# EAGLE board shieldV4 (EAGLE 8.7.1)
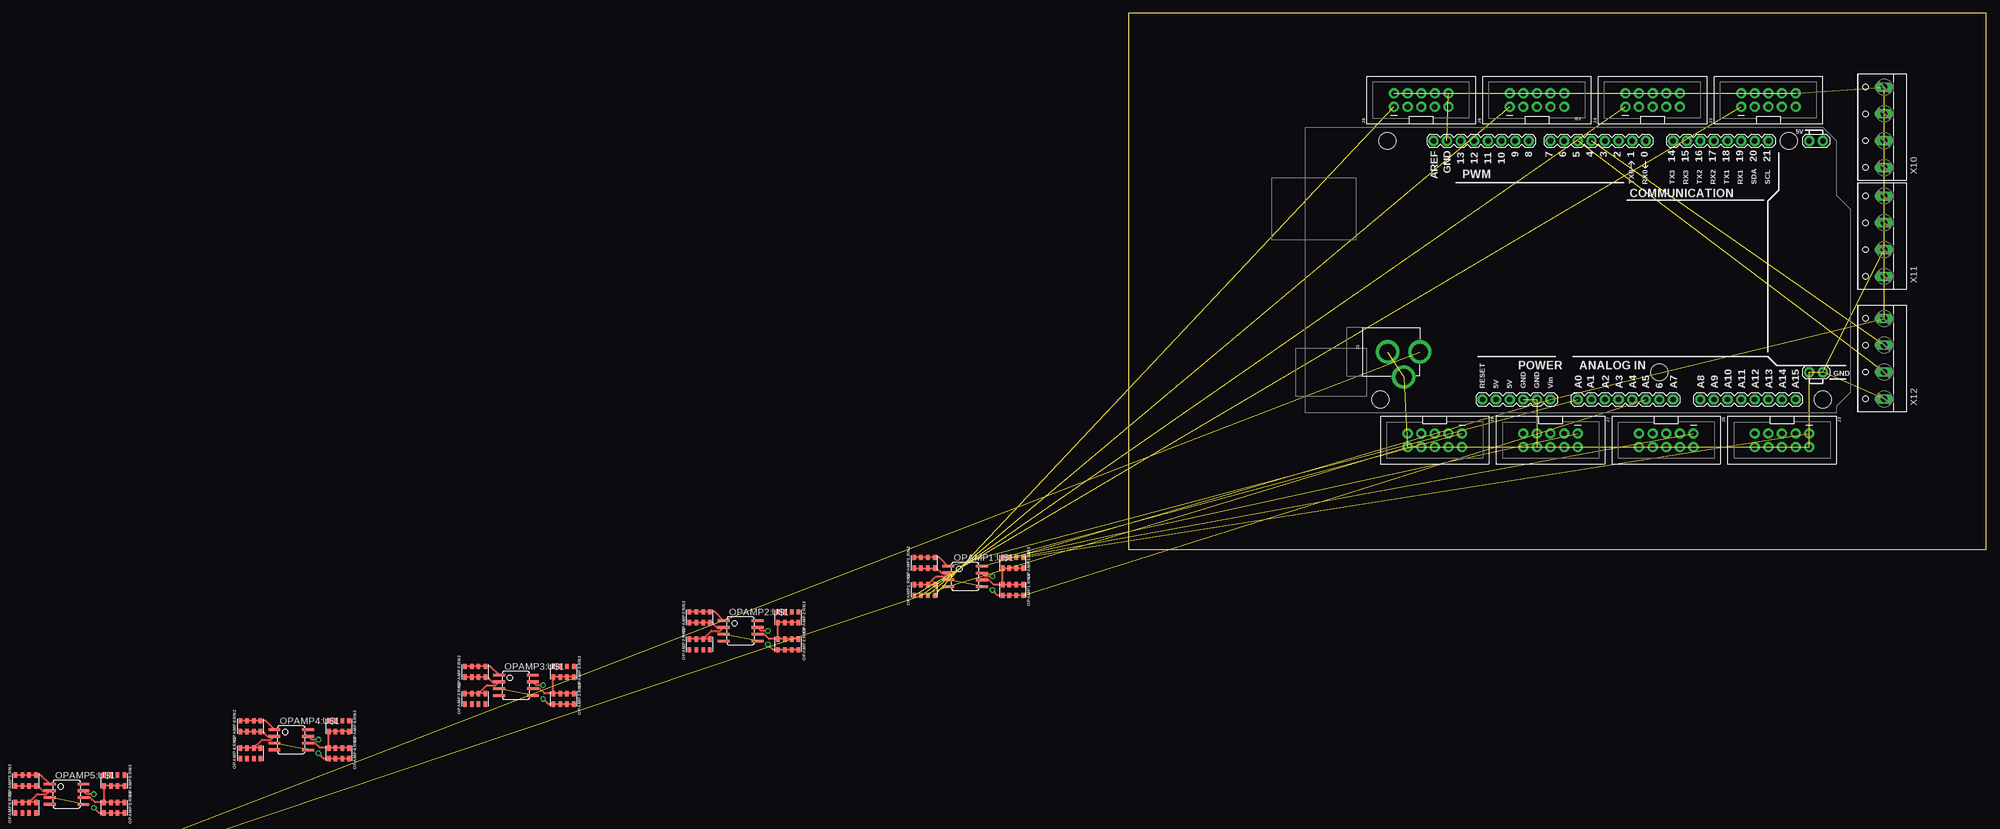
[diagram p0: board, top side]
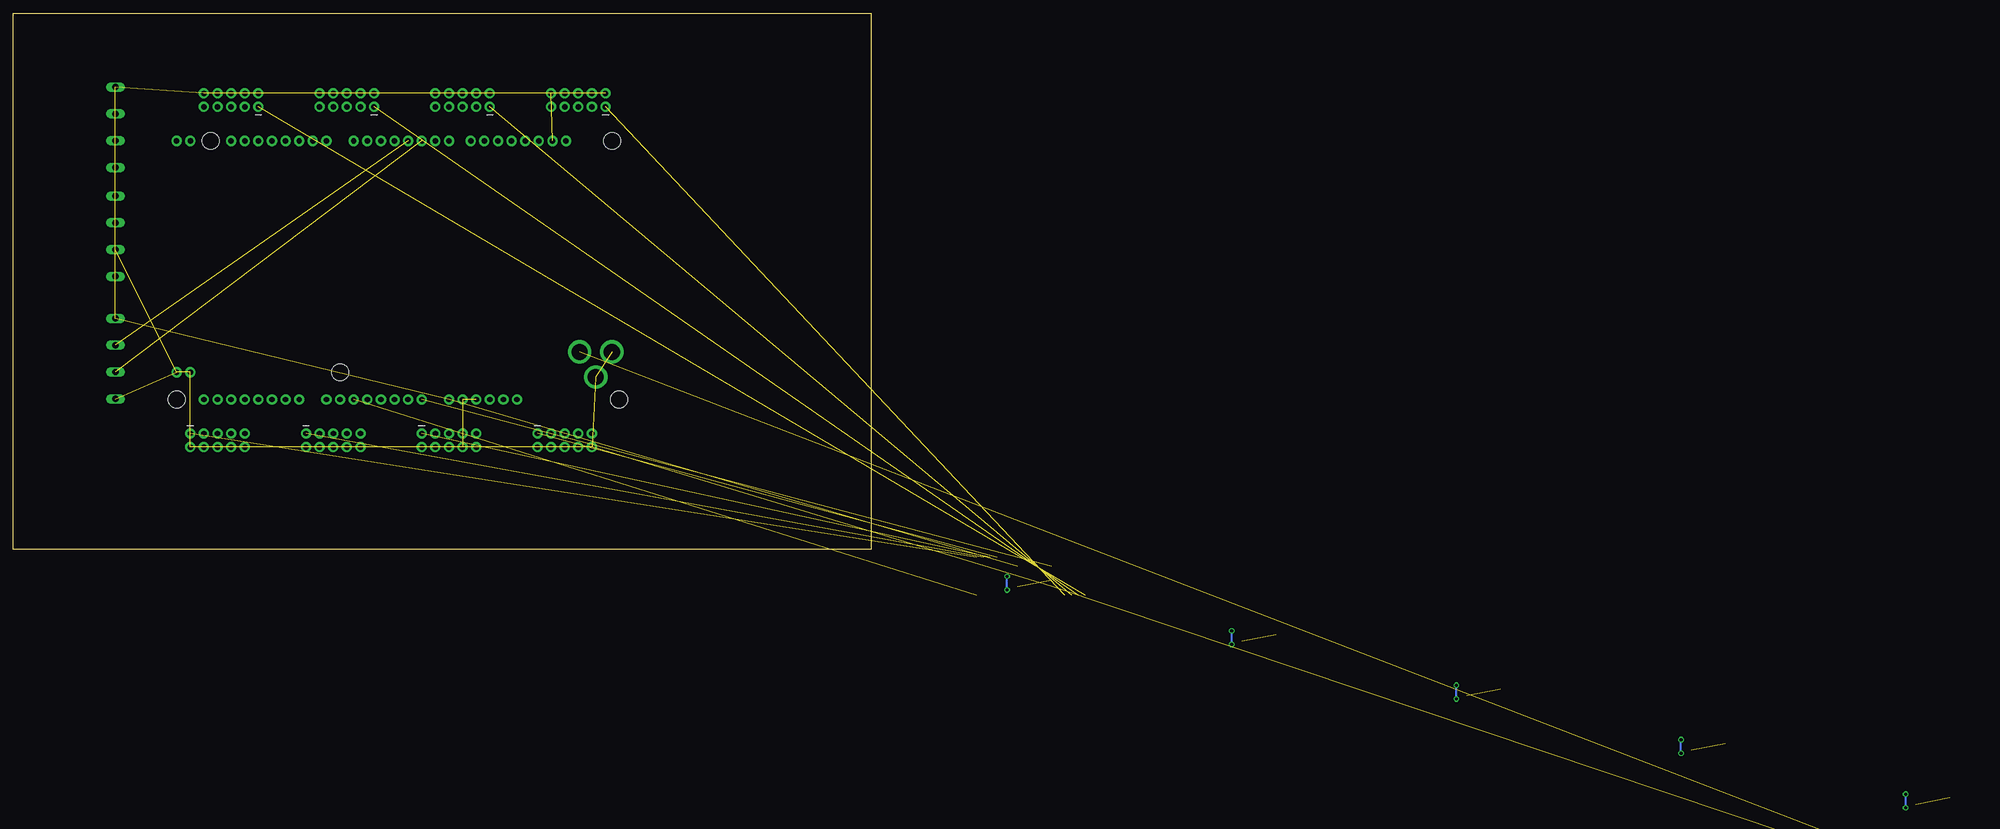
[diagram p1: board, bottom side, seen from below]

Size 160 x 100 mm. Coordinates in mm from the lower left corner, seen from the top.
Outline: 0,0 160,0 160,100 0,100 0,0
Copper layers (1*16): Top 0.035mm / dielectric 1.5mm / Bottom 0.035mm
Design rules "default": minimum track width 6mil, minimum drill 0.35mm, track to track 6mil, track to pad 6mil, pad to pad 6mil, via to via 6mil, smd to smd 6mil, copper to edge 40mil, drill to drill 6mil, minimum pad ring 10mil, minimum via ring 8mil, stop-mask expansion 4mil, vias tented up to drill 0mil, thermal gap 10mil

## Footprints (pad centres in the part's own frame; a part is rotated, then mirrored left to right if it is on the bottom)
ARDUINO_MEGA_EDIT = drill 1.016 pad 1.88: 0 13.97,24.13; 1 11.43,24.13; 2 8.89,24.13; 3 6.35,24.13; 3.3V -13.97,-24.13; 4 3.81,24.13; 5 1.27,24.13; 5V@0 -11.43,-24.13; 5V@1 44.45,24.13; 5V@2 46.99,24.13; 6 -1.27,24.13; 7 -3.81,24.13; 8 -7.874,24.13; 9 -10.414,24.13; 10 -12.954,24.13; 11 -15.494,24.13; 12 -18.034,24.13; 13 -20.574,24.13; 14 19.05,24.13; 15 21.59,24.13; 16 24.13,24.13; 17 26.67,24.13; 18 29.21,24.13; 19 31.75,24.13; 20 34.29,24.13; 21 36.83,24.13; A0 1.27,-24.13; A1 3.81,-24.13; A2 6.35,-24.13; A3 8.89,-24.13; A4 11.43,-24.13; A5 13.97,-24.13; A6 16.51,-24.13; A7 19.05,-24.13; A8 24.13,-24.13; A9 26.67,-24.13; A10 29.21,-24.13; A11 31.75,-24.13; A12 34.29,-24.13; A13 36.83,-24.13; A14 39.37,-24.13; A15 41.91,-24.13; AREF -25.654,24.13; GND@0 -8.89,-24.13; GND@1 -6.35,-24.13; GND@2 44.45,-19.05; GND@3 46.99,-19.05; GND@4 -23.114,24.13; RESET -16.51,-24.13; VIN -3.81,-24.13 | hole 3.2: -34.29,24.13; -35.56,-24.13; 16.51,-19.05; 40.64,24.13; 46.99,-24.13
DO-214AC = smd 1.8 x 2.4: A 2.025,0; C -2.025,0
POWER_JACK_PTH = drill 2.997 pad 4.318: GND 0,7.7; GNDBREAK 4.7,10.7; PWR 0,13.7
2X5-SHROUDED = drill 1.016 pad 1.88: 1 -1.27,5.08; 2 1.27,5.08; 3 -1.27,2.54; 4 1.27,2.54; 5 -1.27,0; 6 1.27,0; 7 -1.27,-2.54; 8 1.27,-2.54; 9 -1.27,-5.08; 10 1.27,-5.08
0805-ARV_EDIT10K = smd 0.65 x 1: 1 -1.905,-1; 2 -0.635,-1; 3 0.635,-1; 4 1.905,-1; 5 1.905,1; 6 0.635,1; 7 -0.635,1; 8 -1.905,1
SOIC8 = smd 0.5 x 2.2: 1 -1.905,-3.154; 2 -0.645,-3.154; 3 0.625,-3.154; 4 1.895,-3.154; 5 1.905,3.154; 6 0.635,3.154; 7 -0.635,3.154; 8 -1.905,3.154
W237-102 = drill 1.194 long: 1 -2.5,-1.27; 2 2.5,-1.27
W237-4 = drill 1.194 long: 1 -7.5,-1.27; 2 -2.5,-1.27; 3 2.5,-1.27; 4 7.5,-1.27

## Placement (x,y rotation side)
B2  ARDUINO_MEGA_R3_EDIT  [ARDUINO_MEGA_EDIT]  82.55,52.07 0 top
D1  [DO-214AC]  -214.63,-64.77 0 top  (outside the outline)
J1  POWER_JACK  [POWER_JACK_PTH]  40.64,36.83 270 top
J2  AVR_SPI_PROG_5X2_NEWPTH2  [2X5-SHROUDED]  119.38,83.82 90 top
J3  AVR_SPI_PROG_5X2_NEWPTH2  [2X5-SHROUDED]  121.92,20.32 270 top
J4  AVR_SPI_PROG_5X2_NEWPTH2  [2X5-SHROUDED]  97.79,83.82 90 top
J5  AVR_SPI_PROG_5X2_NEWPTH2  [2X5-SHROUDED]  100.33,20.32 270 top
J6  AVR_SPI_PROG_5X2_NEWPTH2  [2X5-SHROUDED]  76.2,83.82 90 top
J7  AVR_SPI_PROG_5X2_NEWPTH2  [2X5-SHROUDED]  78.74,20.32 270 top
J8  AVR_SPI_PROG_5X2_NEWPTH2  [2X5-SHROUDED]  54.61,83.82 90 top
J9  AVR_SPI_PROG_5X2_NEWPTH2  [2X5-SHROUDED]  57.15,20.32 270 top
OPAMP1:RN1  10k  [0805-ARV_EDIT10K]  -38.1,-7.62 0 top  (outside the outline)
OPAMP1:RN2  10k  [0805-ARV_EDIT10K]  -38.1,-2.54 0 top  (outside the outline)
OPAMP1:RN3  10k  [0805-ARV_EDIT10K]  -21.59,-2.54 180 top  (outside the outline)
OPAMP1:RN4  10k  [0805-ARV_EDIT10K]  -21.59,-7.62 180 top  (outside the outline)
OPAMP1:U$1  MCP6002SMT  [SOIC8]  -30.48,-5.08 270 top  (outside the outline)
OPAMP2:RN1  10k  [0805-ARV_EDIT10K]  -80.01,-17.78 0 top  (outside the outline)
OPAMP2:RN2  10k  [0805-ARV_EDIT10K]  -80.01,-12.7 0 top  (outside the outline)
OPAMP2:RN3  10k  [0805-ARV_EDIT10K]  -63.5,-12.7 180 top  (outside the outline)
OPAMP2:RN4  10k  [0805-ARV_EDIT10K]  -63.5,-17.78 180 top  (outside the outline)
OPAMP2:U$1  MCP6002SMT  [SOIC8]  -72.39,-15.24 270 top  (outside the outline)
OPAMP3:RN1  10k  [0805-ARV_EDIT10K]  -121.92,-27.94 0 top  (outside the outline)
OPAMP3:RN2  10k  [0805-ARV_EDIT10K]  -121.92,-22.86 0 top  (outside the outline)
OPAMP3:RN3  10k  [0805-ARV_EDIT10K]  -105.41,-22.86 180 top  (outside the outline)
OPAMP3:RN4  10k  [0805-ARV_EDIT10K]  -105.41,-27.94 180 top  (outside the outline)
OPAMP3:U$1  MCP6002SMT  [SOIC8]  -114.3,-25.4 270 top  (outside the outline)
OPAMP4:RN1  10k  [0805-ARV_EDIT10K]  -163.83,-38.1 0 top  (outside the outline)
OPAMP4:RN2  10k  [0805-ARV_EDIT10K]  -163.83,-33.02 0 top  (outside the outline)
OPAMP4:RN3  10k  [0805-ARV_EDIT10K]  -147.32,-33.02 180 top  (outside the outline)
OPAMP4:RN4  10k  [0805-ARV_EDIT10K]  -147.32,-38.1 180 top  (outside the outline)
OPAMP4:U$1  MCP6002SMT  [SOIC8]  -156.21,-35.56 270 top  (outside the outline)
OPAMP5:RN1  10k  [0805-ARV_EDIT10K]  -205.74,-48.26 0 top  (outside the outline)
OPAMP5:RN2  10k  [0805-ARV_EDIT10K]  -205.74,-43.18 0 top  (outside the outline)
OPAMP5:RN3  10k  [0805-ARV_EDIT10K]  -189.23,-43.18 180 top  (outside the outline)
OPAMP5:RN4  10k  [0805-ARV_EDIT10K]  -189.23,-48.26 180 top  (outside the outline)
OPAMP5:U$1  MCP6002SMT  [SOIC8]  -198.12,-45.72 270 top  (outside the outline)
X1  [W237-102]  -196.85,-59.69 0 top  (outside the outline)
X10  [W237-4]  139.7,78.74 90 top
X11  [W237-4]  139.7,58.42 90 top
X12  [W237-4]  139.7,35.56 90 top

## Library data of the parts
B2 = SparkFun-Boards
D1 = diode
J1 = SparkFun-Connectors; PROD_ID: CONN-08197
J2-J9 = SparkFun-Connectors; PROD_ID: CONN-08671; SF_ID: PRT-08506
OPAMP1:RN1-OPAMP1:RN4 OPAMP2:RN1-OPAMP2:RN4 OPAMP3:RN1-OPAMP3:RN4 OPAMP4:RN1-OPAMP4:RN4 OPAMP5:RN1-OPAMP5:RN4 = SparkFun-Resistors
OPAMP1:U$1 OPAMP2:U$1 OPAMP3:U$1 OPAMP4:U$1 OPAMP5:U$1 = adam - ics
X1 = con-wago-500; MPN: 237-102; OC_FARNELL: unknown; OC_NEWARK: 70K9898
X10-X12 = con-wago-500; OC_FARNELL: unknown; OC_NEWARK: unknown

## Nets
+5V: B2.VIN OPAMP1:U$1.8 X10.1 X10.3 X11.1 X11.3 X12.4
A1O: B2.A0 OPAMP1:RN2.5 OPAMP1:RN2.6 OPAMP1:RN2.7 OPAMP1:RN2.8 OPAMP1:U$1.1
A2O: B2.A1
A3O: B2.A2
A4O: B2.A3
A5O: B2.A4
A6O: B2.A5 OPAMP1:RN4.5 OPAMP1:RN4.6 OPAMP1:RN4.7 OPAMP1:RN4.8 OPAMP1:U$1.7
A7O: B2.A6
A8O: B2.A7
A9O: B2.A8
A10O: B2.A9
CI: B2.4 X12.3
DI: B2.5 X12.2
GND: B2.GND@0 B2.GND@1 B2.GND@2 B2.GND@3 B2.GND@4 J1.GND J1.GNDBREAK J2.2 J2.4 J2.6 J2.8 J2.10 J3.2 J3.4 J3.6 J3.8 J3.10 J4.2 J4.4 J4.6 J4.8 J4.10 J5.2 J5.4 J5.6 J5.8 J5.10 J6.2 J6.4 J6.6 J6.8 J6.10 J7.2 J7.4 J7.6 J7.8 J7.10 J8.2 J8.4 J8.6 J8.8 J8.10 J9.2 J9.4 J9.6 J9.8 J9.10 OPAMP1:U$1.4 X1.2 X10.2 X10.4 X11.2 X11.4 X12.1
N$14: OPAMP2:RN1.1
N$15: OPAMP2:RN1.2
N$16: OPAMP2:RN1.3
N$17: OPAMP2:RN1.4
N$18: OPAMP2:RN3.1
N$19: OPAMP2:RN3.2
N$20: OPAMP2:RN3.3
N$21: OPAMP2:RN3.4
N$22: OPAMP2:U$1.8
N$23: OPAMP2:U$1.3 OPAMP2:U$1.5
N$24: OPAMP2:U$1.4
N$25: OPAMP2:RN2.5 OPAMP2:RN2.6 OPAMP2:RN2.7 OPAMP2:RN2.8 OPAMP2:U$1.1
N$26: OPAMP2:RN4.5 OPAMP2:RN4.6 OPAMP2:RN4.7 OPAMP2:RN4.8 OPAMP2:U$1.7
N$27: OPAMP3:RN1.1
N$28: OPAMP3:RN1.2
N$29: OPAMP3:RN1.3
N$30: OPAMP3:RN1.4
N$31: OPAMP3:RN3.1
N$32: OPAMP3:RN3.2
N$33: OPAMP3:RN3.3
N$34: OPAMP3:RN3.4
N$35: OPAMP3:U$1.8
N$36: OPAMP3:U$1.3 OPAMP3:U$1.5
N$37: OPAMP3:U$1.4
N$38: OPAMP3:RN2.5 OPAMP3:RN2.6 OPAMP3:RN2.7 OPAMP3:RN2.8 OPAMP3:U$1.1
N$39: OPAMP3:RN4.5 OPAMP3:RN4.6 OPAMP3:RN4.7 OPAMP3:RN4.8 OPAMP3:U$1.7
N$40: OPAMP4:RN1.1
N$41: OPAMP4:RN1.2
N$42: OPAMP4:RN1.3
N$43: OPAMP4:RN1.4
N$44: OPAMP4:RN3.1
N$45: OPAMP4:RN3.2
N$46: OPAMP4:RN3.3
N$47: OPAMP4:RN3.4
N$48: OPAMP4:U$1.8
N$49: OPAMP4:U$1.3 OPAMP4:U$1.5
N$50: OPAMP4:U$1.4
N$51: OPAMP4:RN2.5 OPAMP4:RN2.6 OPAMP4:RN2.7 OPAMP4:RN2.8 OPAMP4:U$1.1
N$52: OPAMP4:RN4.5 OPAMP4:RN4.6 OPAMP4:RN4.7 OPAMP4:RN4.8 OPAMP4:U$1.7
N$53: OPAMP5:RN1.1
N$54: OPAMP5:RN1.2
N$55: OPAMP5:RN1.3
N$56: OPAMP5:RN1.4
N$57: OPAMP5:RN3.1
N$58: OPAMP5:RN3.2
N$59: OPAMP5:RN3.3
N$60: OPAMP5:RN3.4
N$61: OPAMP5:U$1.8
N$62: OPAMP5:U$1.3 OPAMP5:U$1.5
N$63: OPAMP5:U$1.4
N$64: OPAMP5:RN2.5 OPAMP5:RN2.6 OPAMP5:RN2.7 OPAMP5:RN2.8 OPAMP5:U$1.1
N$65: OPAMP5:RN4.5 OPAMP5:RN4.6 OPAMP5:RN4.7 OPAMP5:RN4.8 OPAMP5:U$1.7
OPAMP1:N$1: OPAMP1:RN3.5 OPAMP1:RN3.6 OPAMP1:RN3.7 OPAMP1:RN3.8 OPAMP1:RN4.1 OPAMP1:RN4.2 OPAMP1:RN4.3 OPAMP1:RN4.4 OPAMP1:U$1.6
OPAMP1:N$2: OPAMP1:RN1.5 OPAMP1:RN1.6 OPAMP1:RN1.7 OPAMP1:RN1.8 OPAMP1:RN2.1 OPAMP1:RN2.2 OPAMP1:RN2.3 OPAMP1:RN2.4 OPAMP1:U$1.2
OPAMP2:N$1: OPAMP2:RN3.5 OPAMP2:RN3.6 OPAMP2:RN3.7 OPAMP2:RN3.8 OPAMP2:RN4.1 OPAMP2:RN4.2 OPAMP2:RN4.3 OPAMP2:RN4.4 OPAMP2:U$1.6
OPAMP2:N$2: OPAMP2:RN1.5 OPAMP2:RN1.6 OPAMP2:RN1.7 OPAMP2:RN1.8 OPAMP2:RN2.1 OPAMP2:RN2.2 OPAMP2:RN2.3 OPAMP2:RN2.4 OPAMP2:U$1.2
OPAMP3:N$1: OPAMP3:RN3.5 OPAMP3:RN3.6 OPAMP3:RN3.7 OPAMP3:RN3.8 OPAMP3:RN4.1 OPAMP3:RN4.2 OPAMP3:RN4.3 OPAMP3:RN4.4 OPAMP3:U$1.6
OPAMP3:N$2: OPAMP3:RN1.5 OPAMP3:RN1.6 OPAMP3:RN1.7 OPAMP3:RN1.8 OPAMP3:RN2.1 OPAMP3:RN2.2 OPAMP3:RN2.3 OPAMP3:RN2.4 OPAMP3:U$1.2
OPAMP4:N$1: OPAMP4:RN3.5 OPAMP4:RN3.6 OPAMP4:RN3.7 OPAMP4:RN3.8 OPAMP4:RN4.1 OPAMP4:RN4.2 OPAMP4:RN4.3 OPAMP4:RN4.4 OPAMP4:U$1.6
OPAMP4:N$2: OPAMP4:RN1.5 OPAMP4:RN1.6 OPAMP4:RN1.7 OPAMP4:RN1.8 OPAMP4:RN2.1 OPAMP4:RN2.2 OPAMP4:RN2.3 OPAMP4:RN2.4 OPAMP4:U$1.2
OPAMP5:N$1: OPAMP5:RN3.5 OPAMP5:RN3.6 OPAMP5:RN3.7 OPAMP5:RN3.8 OPAMP5:RN4.1 OPAMP5:RN4.2 OPAMP5:RN4.3 OPAMP5:RN4.4 OPAMP5:U$1.6
OPAMP5:N$2: OPAMP5:RN1.5 OPAMP5:RN1.6 OPAMP5:RN1.7 OPAMP5:RN1.8 OPAMP5:RN2.1 OPAMP5:RN2.2 OPAMP5:RN2.3 OPAMP5:RN2.4 OPAMP5:U$1.2
S1A: J2.1 OPAMP1:RN1.1
S1B: J3.1 OPAMP1:RN3.1
S2A: J2.3
S2B: J3.3
S3A: J2.5
S3B: J3.5
S4A: J2.7
S4B: J3.7
S5A: J2.9
S5B: J3.9
S6A: J4.1 OPAMP1:RN1.2
S6B: J5.1 OPAMP1:RN3.2
S7A: J4.3
S7B: J5.3
S8A: J4.5
S8B: J5.5
S9A: J4.7
S9B: J5.7
S10A: J4.9
S10B: J5.9
S11A: J6.1 OPAMP1:RN1.3
S11B: J7.1 OPAMP1:RN3.3
S12A: J6.3
S12B: J7.3
S13A: J6.5
S13B: J7.5
S14A: J6.7
S14B: J7.7
S15A: J6.9
S15B: J7.9
S16A: J8.1 OPAMP1:RN1.4
S16B: J9.1 OPAMP1:RN3.4
S17A: J8.3
S17B: J9.3
S18A: J8.5
S18B: J9.5
S19A: J8.7
S19B: J9.7
S20A: J8.9
S20B: J9.9
VIN: J1.PWR X1.1
VREF: OPAMP1:U$1.3 OPAMP1:U$1.5

## Tracks (layer width: path | path; a pad name or v marks a point on that pad's centre or on a via)
+5V  (6 unrouted)
A1O  (1 unrouted)
  Top 0.406: OPAMP1:U$1.1 -35.27,-1.54 OPAMP1:RN2.5 OPAMP1:RN2.6 OPAMP1:RN2.7 OPAMP1:RN2.8
A6O  (via drill 0.6)  (1 unrouted)
  Top 0.406: OPAMP1:RN4.8 OPAMP1:RN4.7 OPAMP1:RN4.6 OPAMP1:RN4.5 -24.4,-8.62 v-25.4,-7.62 | v-25.4,-5.08 -26.69,-5.08 OPAMP1:U$1.7
  Bottom 0.406: v-25.4,-7.62 v-25.4,-5.08
CI  (1 unrouted)
DI  (1 unrouted)
GND  (53 unrouted)
N$23  (1 unrouted)
N$25
  Top 0.406: OPAMP2:U$1.1 -77.18,-11.7 OPAMP2:RN2.5 OPAMP2:RN2.6 OPAMP2:RN2.7 OPAMP2:RN2.8
N$26  (via drill 0.6)
  Top 0.406: OPAMP2:RN4.8 OPAMP2:RN4.7 OPAMP2:RN4.6 OPAMP2:RN4.5 -66.31,-18.78 v-67.31,-17.78 | v-67.31,-15.24 -68.6,-15.24 OPAMP2:U$1.7
  Bottom 0.406: v-67.31,-17.78 v-67.31,-15.24
N$36  (1 unrouted)
N$38
  Top 0.406: OPAMP3:U$1.1 -119.09,-21.86 OPAMP3:RN2.5 OPAMP3:RN2.6 OPAMP3:RN2.7 OPAMP3:RN2.8
N$39  (via drill 0.6)
  Top 0.406: OPAMP3:RN4.8 OPAMP3:RN4.7 OPAMP3:RN4.6 OPAMP3:RN4.5 -108.22,-28.94 v-109.22,-27.94 | v-109.22,-25.4 -110.51,-25.4 OPAMP3:U$1.7
  Bottom 0.406: v-109.22,-27.94 v-109.22,-25.4
N$49  (1 unrouted)
N$51
  Top 0.406: OPAMP4:U$1.1 -161,-32.02 OPAMP4:RN2.5 OPAMP4:RN2.6 OPAMP4:RN2.7 OPAMP4:RN2.8
N$52  (via drill 0.6)
  Top 0.406: OPAMP4:RN4.8 OPAMP4:RN4.7 OPAMP4:RN4.6 OPAMP4:RN4.5 -150.13,-39.1 v-151.13,-38.1 | v-151.13,-35.56 -152.42,-35.56 OPAMP4:U$1.7
  Bottom 0.406: v-151.13,-38.1 v-151.13,-35.56
N$62  (1 unrouted)
N$64
  Top 0.406: OPAMP5:U$1.1 -202.91,-42.18 OPAMP5:RN2.5 OPAMP5:RN2.6 OPAMP5:RN2.7 OPAMP5:RN2.8
N$65  (via drill 0.6)
  Top 0.406: OPAMP5:RN4.8 OPAMP5:RN4.7 OPAMP5:RN4.6 OPAMP5:RN4.5 -192.04,-49.26 v-193.04,-48.26 | v-193.04,-45.72 -194.33,-45.72 OPAMP5:U$1.7
  Bottom 0.406: v-193.04,-48.26 v-193.04,-45.72
OPAMP1:N$1
  Top 0.406: OPAMP1:RN3.8 OPAMP1:RN3.7 OPAMP1:RN3.6 OPAMP1:RN3.5 -23.5,-6.35 | -23.5,-6.35 OPAMP1:RN4.4 -25.13,-6.62 -26.04,-5.71 OPAMP1:U$1.6 | OPAMP1:RN4.1 OPAMP1:RN4.2 OPAMP1:RN4.3 -23.23,-6.62 -23.5,-6.35
OPAMP1:N$2
  Top 0.406: OPAMP1:RN1.5 OPAMP1:RN1.6 | OPAMP1:RN1.6 OPAMP1:RN1.7 OPAMP1:RN1.8 | OPAMP1:RN1.6 -35.92,-5.08 -34.28,-5.08 OPAMP1:U$1.2 -34.94,-4.43 -35.83,-3.54 OPAMP1:RN2.4 OPAMP1:RN2.3 OPAMP1:RN2.2 OPAMP1:RN2.1
OPAMP2:N$1
  Top 0.406: OPAMP2:RN3.8 OPAMP2:RN3.7 OPAMP2:RN3.6 OPAMP2:RN3.5 -65.41,-16.51 | -65.41,-16.51 OPAMP2:RN4.4 -67.04,-16.78 -67.94,-15.88 OPAMP2:U$1.6 | OPAMP2:RN4.1 OPAMP2:RN4.2 OPAMP2:RN4.3 -65.14,-16.78 -65.41,-16.51
OPAMP2:N$2
  Top 0.406: OPAMP2:RN1.5 OPAMP2:RN1.6 | OPAMP2:RN1.6 OPAMP2:RN1.7 OPAMP2:RN1.8 | OPAMP2:RN1.6 -77.83,-15.24 -76.19,-15.24 OPAMP2:U$1.2 -76.84,-14.6 -77.74,-13.7 OPAMP2:RN2.4 OPAMP2:RN2.3 OPAMP2:RN2.2 OPAMP2:RN2.1
OPAMP3:N$1
  Top 0.406: OPAMP3:RN3.8 OPAMP3:RN3.7 OPAMP3:RN3.6 OPAMP3:RN3.5 -107.31,-26.67 | -107.31,-26.67 OPAMP3:RN4.4 -108.95,-26.94 -109.86,-26.04 OPAMP3:U$1.6 | OPAMP3:RN4.1 OPAMP3:RN4.2 OPAMP3:RN4.3 -107.05,-26.94 -107.31,-26.67
OPAMP3:N$2
  Top 0.406: OPAMP3:RN1.5 OPAMP3:RN1.6 | OPAMP3:RN1.6 OPAMP3:RN1.7 OPAMP3:RN1.8 | OPAMP3:RN1.6 -119.75,-25.4 -118.1,-25.4 OPAMP3:U$1.2 -118.75,-24.75 -119.65,-23.86 OPAMP3:RN2.4 OPAMP3:RN2.3 OPAMP3:RN2.2 OPAMP3:RN2.1
OPAMP4:N$1
  Top 0.406: OPAMP4:RN3.8 OPAMP4:RN3.7 OPAMP4:RN3.6 OPAMP4:RN3.5 -149.22,-36.83 | -149.22,-36.83 OPAMP4:RN4.4 -150.86,-37.1 -151.76,-36.2 OPAMP4:U$1.6 | OPAMP4:RN4.1 OPAMP4:RN4.2 OPAMP4:RN4.3 -148.96,-37.1 -149.22,-36.83
OPAMP4:N$2
  Top 0.406: OPAMP4:RN1.5 OPAMP4:RN1.6 | OPAMP4:RN1.6 OPAMP4:RN1.7 OPAMP4:RN1.8 | OPAMP4:RN1.6 -161.66,-35.56 -160.01,-35.56 OPAMP4:U$1.2 -160.66,-34.91 -161.56,-34.02 OPAMP4:RN2.4 OPAMP4:RN2.3 OPAMP4:RN2.2 OPAMP4:RN2.1
OPAMP5:N$1
  Top 0.406: OPAMP5:RN3.8 OPAMP5:RN3.7 OPAMP5:RN3.6 OPAMP5:RN3.5 -191.13,-46.99 | -191.13,-46.99 OPAMP5:RN4.4 -192.77,-47.26 -193.68,-46.35 OPAMP5:U$1.6 | OPAMP5:RN4.1 OPAMP5:RN4.2 OPAMP5:RN4.3 -190.87,-47.26 -191.13,-46.99
OPAMP5:N$2
  Top 0.406: OPAMP5:RN1.5 OPAMP5:RN1.6 | OPAMP5:RN1.6 OPAMP5:RN1.7 OPAMP5:RN1.8 | OPAMP5:RN1.6 -203.56,-45.72 -201.92,-45.72 OPAMP5:U$1.2 -202.57,-45.08 -203.47,-44.18 OPAMP5:RN2.4 OPAMP5:RN2.3 OPAMP5:RN2.2 OPAMP5:RN2.1
S1A  (1 unrouted)
S1B  (1 unrouted)
S6A  (1 unrouted)
S6B  (1 unrouted)
S11A  (1 unrouted)
S11B  (1 unrouted)
S16A  (1 unrouted)
S16B  (1 unrouted)
VIN  (1 unrouted)
VREF  (1 unrouted)